# EAGLE board dado-eletronico01 (EAGLE 9.7.0)

Size 173.99 x 59.69 mm. Coordinates in mm from the lower left corner, seen from the top.
Outline: 0,0 173.99,0 173.99,59.69 0,59.69 0,0
Copper layers (1*16): Top 0.035mm / dielectric 1.5mm / Bottom 0.035mm
Design rules "default": minimum track width 6mil, minimum drill 0.35mm, track to track 6mil, track to pad 6mil, pad to pad 6mil, via to via 6mil, smd to smd 6mil, copper to edge 40mil, drill to drill 6mil, minimum pad ring 10mil, minimum via ring 8mil, stop-mask expansion 4mil, vias tented up to drill 0mil, thermal gap 10mil

## Footprints (pad centres in the part's own frame; a part is rotated, then mirrored left to right if it is on the bottom)
7SEG-13 = drill 0.813 long: 1 -5.08,-7.62; 2 -2.54,-7.62; 3 0,-7.62; 4 2.54,-7.62; 5 5.08,-7.62; 6 5.08,7.62; 7 2.54,7.62; 8 0,7.62; 9 -2.54,7.62; 10 -5.08,7.62
RESAD1016W63L850D250B = drill 0.83 pad 1.43: 1 -5.08,0; 2 5.08,0
SWITCH-MOMENTARY-PTH-6.5MM = drill 1.016 pad 1.88: 1 -3.251,2.261; 2 3.251,2.261; 3 -3.251,-2.261; 4 3.251,-2.261
ARDUINO-UNO-R3-SHIELD = drill 1.016 pad 1.88: 3.3V 24.13,-2.54; 5V 24.13,0; A0 24.13,12.7; A1 24.13,15.24; A2 24.13,17.78; A3 24.13,20.32; A4 24.13,22.86; A5 24.13,25.4; AREF -24.13,-13.97; D2 -24.13,20.32; D3 -24.13,17.78; D4 -24.13,15.24; D5 -24.13,12.7; D6 -24.13,10.16; D7 -24.13,7.62; D8 -24.13,3.81; D9 -24.13,1.27; D10 -24.13,-1.27; D11 -24.13,-3.81; D12 -24.13,-6.35; D13 -24.13,-8.89; GND@0 24.13,2.54; GND@1 24.13,5.08; GND@2 -24.13,-11.43; IOREF 24.13,-7.62; NC 24.13,-10.16; RES 24.13,-5.08; RX -24.13,25.4; SCL -24.13,-19.05; SDA -24.13,-16.51; TX -24.13,22.86; VIN 24.13,7.62
DIP762W53P254L1969H508Q16B = drill 0.743 pad 1.343: 1 -3.81,8.89; 2 -3.81,6.35; 3 -3.81,3.81; 4 -3.81,1.27; 5 -3.81,-1.27; 6 -3.81,-3.81; 7 -3.81,-6.35; 8 -3.81,-8.89; 9 3.81,-8.89; 10 3.81,-6.35; 11 3.81,-3.81; 12 3.81,-1.27; 13 3.81,1.27; 14 3.81,3.81; 15 3.81,6.35; 16 3.81,8.89

## Placement (x,y rotation side)
DIGIT1  7SEG-CK  [7SEG-13]  135.26,29.47 0 top
R1  220  [RESAD1016W63L850D250B]  127.64,16.77 0 top
R2  220  [RESAD1016W63L850D250B]  142.88,39.63 0 top
R3  220  [RESAD1016W63L850D250B]  142.88,16.77 0 top
R4  220  [RESAD1016W63L850D250B]  125.1,19.31 0 top
R5  220  [RESAD1016W63L850D250B]  147.96,42.17 0 top
R6  220  [RESAD1016W63L850D250B]  145.42,19.31 0 top
R7  220  [RESAD1016W63L850D250B]  125.1,44.71 0 top
R8  220  [RESAD1016W63L850D250B]  127.64,42.17 0 top
S1  SWITCH_MOMENTARY  [SWITCH-MOMENTARY-PTH-6.5MM]  165.74,30.74 90 top
U1  ARDUINO-UNO-R3-SHIELD  [ARDUINO-UNO-R3-SHIELD]  47.88,29.84 270 top
U2  74HC595_PDIP  [DIP762W53P254L1969H508Q16B]  103.51,30.74 90 top

## Library data of the parts
DIGIT1 = Tinkercad; CATEGORY: Opto-Electronic; SUB-CATEGORY: Display; TYPE: 7-Segment
R1-R8 S1 U1 U2 = Tinkercad

## Nets
DIGIT1_A: DIGIT1.7 R2.1
DIGIT1_C: DIGIT1.4 R3.1
DIGIT1_D: DIGIT1.2 R1.2
DIGIT1_DP: DIGIT1.5 R6.1
DIGIT1_E: DIGIT1.1 R4.2
DIGIT1_F: DIGIT1.9 R8.2
DIGIT1_G: DIGIT1.10 R7.2
S1_4: S1.3 S1.4
U1_5V: U1.5V U2.16
U1_D2: S1.1 S1.2 U1.D2
U1_GND: DIGIT1.3 DIGIT1.8 U1.GND@0 U1.GND@1 U1.GND@2
U2_Q0: R2.2 U2.15
U2_Q1: R5.2 U2.1
U2_Q2: R3.2 U2.2
U2_Q5: R8.1 U2.5
U2_Q6: R7.1 U2.6
U2_Q7: R6.2 U2.7

## Tracks (layer width: path | path; a pad name or v marks a point on that pad's centre or on a via)
DIGIT1_A  (1 unrouted)
DIGIT1_C  (1 unrouted)
DIGIT1_D  (1 unrouted)
DIGIT1_DP  (1 unrouted)
DIGIT1_E  (1 unrouted)
DIGIT1_F  (1 unrouted)
DIGIT1_G  (1 unrouted)
S1_4  (1 unrouted)
U1_5V  (1 unrouted)
U1_D2  (2 unrouted)
U1_GND  (4 unrouted)
U2_Q0  (1 unrouted)
U2_Q1  (1 unrouted)
U2_Q2  (1 unrouted)
U2_Q5  (1 unrouted)
U2_Q6  (1 unrouted)
U2_Q7  (1 unrouted)